# Altium PCB daplink_pzh.PcbDoc
Units mm, origin at the board's own origin, x right, y up, seen from the top; angles counter-clockwise.
Board outline 11.94 x 27.18 mm, 2 copper layers (Top1, Bottom2), stack 1.671 mm thick; 22 components, 28 nets, 122 pads, 54 vias.
Unrouted connection lines stored in the file: 21.
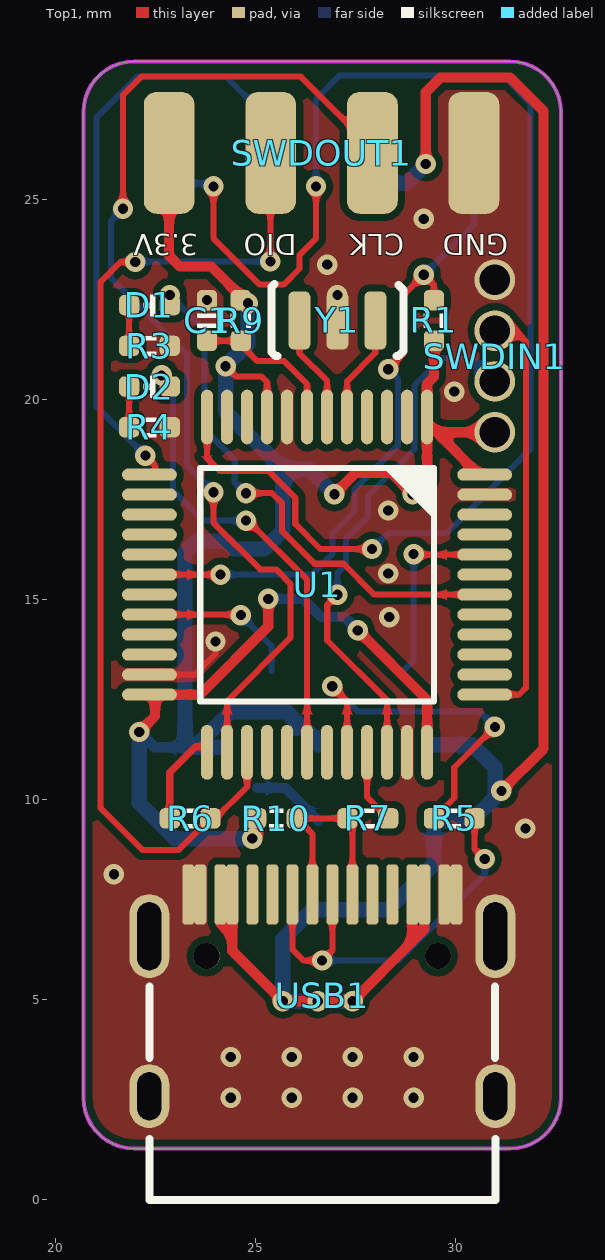
[diagram p0: Top1 view]
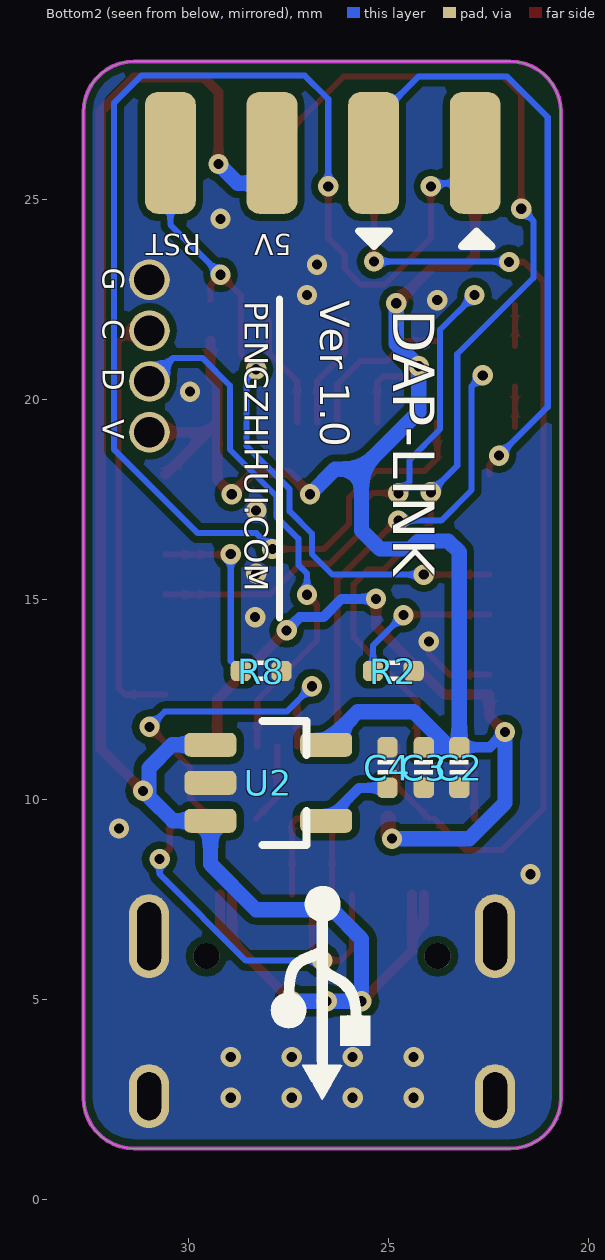
[diagram p1: Bottom2 view, seen from below]
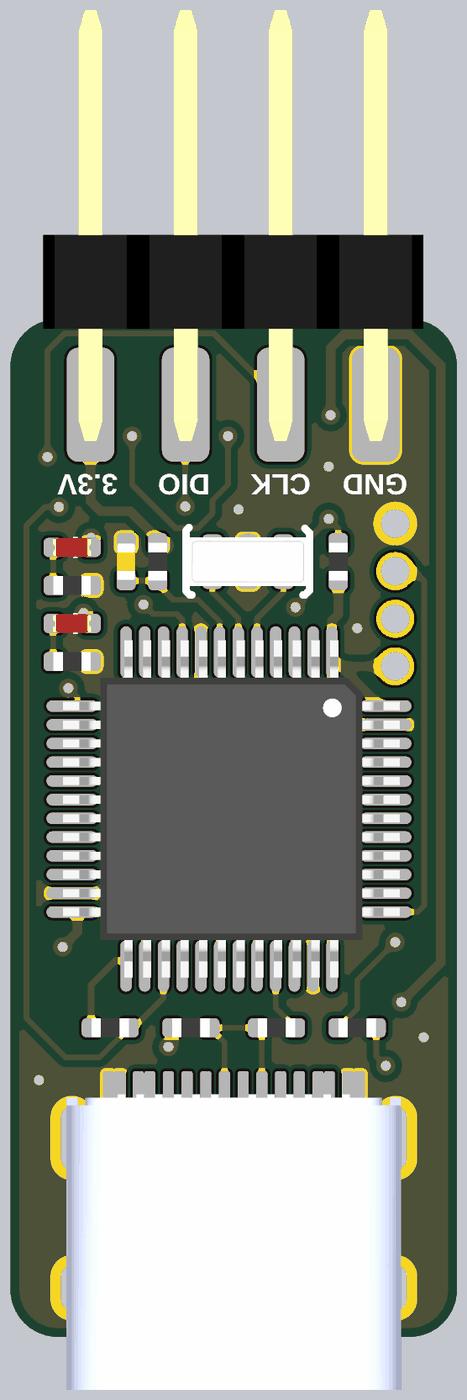
[diagram p2: 3D render of the assembled board from above, using the file's embedded part models]
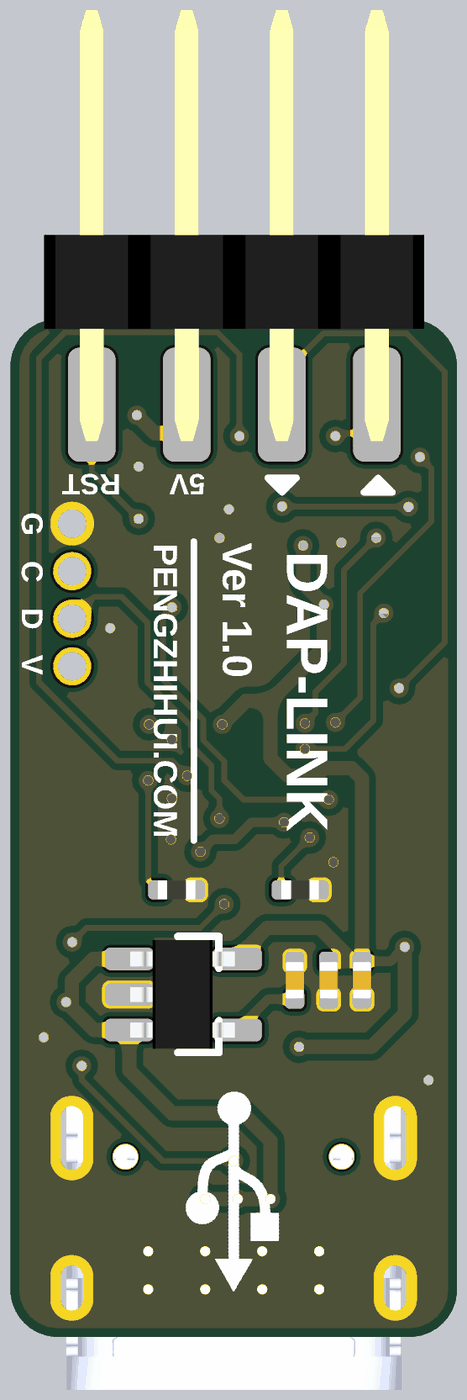
[diagram p3: 3D render of the assembled board from below, using the file's embedded part models]

## Layer stack, top to bottom
Top Solder: solder mask 0.0102, Solder Resist, Dk 3.5
Top1: signal copper 0.0356
Dielectric 1: core 1.6, FR-4, Dk 4.2
Bottom2: signal copper 0.0356
Bottom Solder: solder mask 0.0102, Solder Resist, Dk 3.5

## Board outline
20.701,2.54 20.701,27.178 cw(c21.971,27.178) 21.971,28.448 31.369,28.448 cw(c31.369,27.178) 32.639,27.178 32.639,2.54 cw(c31.369,2.54) 31.369,1.27 21.971,1.27 cw(c21.971,2.54)

## Design rules (kind name [scope] priority, off if disabled: settings)
Clearance [All] p1: gap=0.178 ignorepadtopadclearanceinfootprint=FALSE except(0: Arc-Hole Track-Hole SMDPad-Hole THPad-Hole Via-Hole Fill-Hole Poly-Hole Region-Hole Text-Hole)
ComponentClearance [All] p1: gap=0 collisioncheckmode=3 verticalgap=0 showdistances=FALSE
DiffPairsRouting [All] p1: maxlimit=2.54 minlimit=0.152 mostfreqgap=0.152 toplayer_minwidth=0.152 toplayer_maxwidth=2.54 toplayer_prefwidth=0.152 bottomlayer_minwidth=0.152 bottomlayer_maxwidth=2.54 bottomlayer_prefwidth=0.152 maxuncoupledlength=12.7
FanoutControl Fanout_BGA [All] p1: bgadir=Out bgaviamode=Centered fanoutstyle=Auto fanoutdirection=Alternating viagrid=0.025 // Fanout_BGA (Default Rule)
HoleSize [All] p1: absolutevalues=TRUE maxlimit=254 minlimit=0.203 maxpercent=80.000 minpercent=20.000
MinimumSolderMaskSliver [All] p1 off: minsoldermaskwidth=0.051
PlaneClearance [All] p1: clearance=0.203
PlaneConnect [All] p1: planeconnectstyle=Direct reliefexpansion=0.508 reliefentries=4 reliefconductorwidth=0.254 reliefairgap=0.254
PolygonConnect [All] p1: connectstyle=Direct reliefconductorwidth=0.254 reliefentries=4 polygonreliefangle="90 Angle" airgapwidth=0.254
RoutingVias [All] p1: holewidth=0.203 width=0.406 viastyle="Through Hole" minholewidth=0.152 minwidth=0.305 maxholewidth=0.711 maxwidth=1.27
SilkToBoardRegionClearance [All] p1 off:
SilkToSilkClearance [All] p1: silktosilkclearance=0
SilkToSolderMaskClearance [IsPad] p1: minsilkscreentomaskgap=0 clearancetoexposedcopper=TRUE
SolderMaskExpansion [All] p1: expansion=0.076
Width [All] p1: maxlimit=2.54 minlimit=0.152 preferedwidth=0.254
20 further rules are at their usual default settings.

## Classes and differential pairs
differential pair USB: +USB_P -USB_N

## Components (designator, comment, footprint, x,y, rotation, side; value= is the part's Value field where it differs from the comment)
C1 "0.1uF" CAP_0402 23.793,21.971 r270 top value=0.1u
C2 "0.1uF" CAP_0402 23.241,10.795 r90 bottom value=0.1u
C3 "10uF" CAP_0402 24.13,10.795 r90 bottom value=0.1u
C4 "10nF" CAP_0402 25.038,10.795 r270 bottom value=0.1u
D1 "color?" LED_0402_RED 22.352,22.352 r180 top
D2 "color?" LED_0402_RED 22.352,20.32 r180 top
R1 "10K" RES_0402 29.464,21.971 r270 top value=22R
R2 "10K" RES_0402 24.892,13.208 r180 bottom value=22R
R3 "2K" RES_0402 22.352,21.336 r180 top value=22R
R4 "2K" RES_0402 22.352,19.304 r180 top value=22R
R5 "22R" RES_0402 29.972,9.525 r180 top
R6 "100R" RES_0402 23.368,9.525 r0 top value=22R
R7 "22R" RES_0402 27.813,9.525 r0 top
R8 "10K" RES_0402 28.194,13.208 r180 bottom value=22R
R9 "10K" RES_0402 24.638,21.971 r90 top value=22R
R10 "1K5" RES_0402 25.527,9.525 r180 top value=22R
SWDIN1 "HDR1x4hole_1.25" HDR1X4_1.27_180 30.988,19.177 r180 top
SWDOUT1 "HDR2x4_2.54" HDR2X4_2.54_180H 22.845,26.162 r90 top
U1 "STM32F103CBT6" LQFP-48 26.543,15.367 r270 top locked
U2 "LP2992 3V3" SOT23-5 27.964,10.414 r180 bottom locked
USB1 "Type-C" Type-C-TOP 26.674,5.1 r270 top
Y1 "8MHz" 晶振-3P 27.051,21.971 r0 top

## Footprints (in the part's own frame and the unit in brackets; to place one, negate y for a bottom-side part, rotate by r counter-clockwise, add the part's x,y. Pads: shape width x height; smd on the part's side, far side on the other; paste and mask are expansions set on the pad)
CAP_0402 [mil]
  rrect50% 20x20 smd: 1(-20,0) 2(20,0)
  silkscreen extent -7,-9 7,9, body extent -20,-10 20,10, height 20
HDR1X4_1.27_180 [mil]
  round 40 hole 30: 1(0,0) 2(0,-50) 3(0,-100) 4(0,-150)
HDR2X4_2.54_180H [mil]
  rrect50% 120x50 smd: 1(0,0) 3(0,-100) 5(0,-200) 7(0,-300)
  rrect50% 120x50 smd far side: 2(0,0) 4(0,-100) 6(0,-200) 8(0,-300)
  body extent -38,-350 415,50, height 65
LED_0402_RED [mil]
  rrect50% 20x20 smd: 1(-20,0) 2(20,0)
  silkscreen extent -6,-10 6,10, body extent -20,-10 20,10, height 18
LQFP-48 [mil]
  oval 54x12 smd: 1(-165,108.27) 2(-165,88.58) 3(-165,68.9) 4(-165,49.21) 5(-165,29.53) 6(-165,9.84) 7(-165,-9.84) 8(-165,-29.53) 9(-165,-49.21) 10(-165,-68.9) 11(-165,-88.58) 12(-165,-108.27) 25(165,-108.27) 26(165,-88.58) 27(165,-68.9) 28(165,-49.21) 29(165,-29.53) 30(165,-9.84) 31(165,9.84) 32(165,29.53) 33(165,49.21) 34(165,68.9) 35(165,88.58) 36(165,108.27)
  oval 12x54 smd: 13(-108.27,-165) 14(-88.58,-165) 15(-68.9,-165) 16(-49.21,-165) 17(-29.53,-165) 18(-9.84,-165) 19(9.84,-165) 20(29.53,-165) 21(49.21,-165) 22(68.9,-165) 23(88.58,-165) 24(108.27,-165) 37(108.27,165) 38(88.58,165) 39(68.9,165) 40(49.21,165) 41(29.53,165) 42(9.84,165) 43(-9.84,165) 44(-29.53,165) 45(-49.21,165) 46(-68.9,165) 47(-88.58,165) 48(-108.27,165)
  silkscreen extent -115,-115 115,115, body extent -177,-175 177,180, height 61
RES_0402 [mil]
  rrect50% 20x20 smd: 1(-20,0) 2(20,0)
  silkscreen extent -7,-10 7,10, body extent -20,-10 20,10, height 14
SOT23-5 [mm] "SOT23, 3-Leads, Body 3.1x3.0mm (max), Pitch 0.95mm, IPC Medium Density"
  rrect50% 1.3x0.6 smd: 1(-1.5,0.95) 2(-1.5,0) 3(-1.5,-0.95) 4(1.396,-0.95) 5(1.396,0.95)
  silkscreen extent -0.2,-1.55 0.9,1.55, body extent -1.48,-1.45 1.32,1.45, height 1.2
Type-C-TOP [mm]
  round 0.65 hole 0.65: 0(-0.98,2.89) 0(-0.98,-2.89)
  oval 1.6x1 hole 0.6 slot 1.2 at 0 deg: 1(2.52,4.325) 2(2.52,-4.325)
  oval 2.1x1 hole 0.6 slot 1.7 at 0 deg: 3(-1.48,-4.325) 4(-1.48,4.325)
  rrect50% 1.5x0.3 smd: A1(-2.52,-3.35) A4(-2.52,-2.55) A5(-2.52,-1.25) A6(-2.52,-0.25) A7(-2.52,0.25) A8(-2.52,1.25) A9(-2.52,2.55) A12(-2.52,3.35) B1(-2.52,3.05) B4(-2.52,2.25) B5(-2.52,1.75) B6(-2.52,0.75) B7(-2.52,-0.75) B8(-2.52,-1.75) B9(-2.52,-2.25) B12(-2.52,-3.05)
  silkscreen extent -0.22,-4.33 5.12,4.33, body extent -2.64,-4.48 5.26,4.46, height 3.28
晶振-3P [mm] "贴片晶振"
  rrect50% 0.55x1.45 smd: 1(-0.95,0) 2(0,0) 3(0.95,0)
  silkscreen extent -1.65,-0.89 1.65,0.91, body extent -1.65,-0.89 1.65,0.89, height 0.8

## Part data
C1 C2 C3 C4: library part 电容-0402, "Capacitor"
D1 D2: library part LED_0402, "LED", Type=0402
R1 R2 R3 R4 R5 R6 R7 R8 R9 R10: library part 电阻-0402, "Resistor"
SWDIN1 SWDOUT1: "Header"
U1: "ARM Cortex-M3 32-bit MCU, 128 KB Flash, 20 KB Internal RAM, 37 I/Os, 48-pin LQFP, -40 to 85 degC, Tray", I/Os (High Current)=37, Operating Frequency(F) (Processor speed) (MHz)=72, Supplier Part Number 1=497-6288-ND, Supply Voltage(Vcc) min (V)=2, A/D Converter="2x12-bit (10 Channel)", ComponentLink1Description="Manufacturer URL", ComponentLink1URL=http://www.st.com/web/en/home.html, ComponentLink2Description=Datasheet, ComponentLink2URL=http://www.st.com/st-web-ui/static/active/en/resource/technical/document/datasheet/CD00161566.pdf, ComponentLink3Description="Package Specification", ComponentLink3URL=http://www.st.com/st-web-ui/static/active/en/resource/technical/document/datasheet/DM00058181.pdf, Core="ARM Cortex-M3", DatasheetVersion="Rev. 16", FLASH Size (Prog) (kB)=128, Internal RAM Size (kB)=20, Mounting Technology="Surface Mount", PackageDescription="48-Pin Low Profile Quad Flat Package, 7 x 7 mm Body, 0.5 mm Pitch", PackageReference=LQFP48, PackageVersion="Rev. 6, 06/2013", Packing=Tray, PartNumber=STM32F103CBT6, Supplier 1=Digi-Key, Supplier 2=Farnell, Supplier 3=Newark, Supplier 4=Newark, Supplier 5=Mouser, Supplier Part Number 2=1606327, Supplier Part Number 3=11N8296, Supplier Part Number 4=57P1214, Supplier Part Number 5=511-STM32F103CBT6
U2: library part LP2992, "LDO"
USB1: library part USB-Type-C-TOP
Y1: library part 晶振-3Pin, "村田贴片"

## Via types
v1: diameter 0.508, hole 0.254, Top1 to Bottom2, tented both sides, 54 vias

## Nets (pads, with @x,y where several pads share a name; then routed paths per layer and width w, separated by ;. In a path a pad name is that pad's centre, name@x,y a point inside that pad or via, vN(x,y) a via of type N, cw(c..) or ccw(c..) an arc to the next point about the centre after c; other vN are vias at no path point)
3V3: C2.2 C3.2 R1.2 R9.2 R10.2 SWDIN1.1 SWDOUT1.1 U1.1 U1.9 U1.24 U1.36 U1.48 U2.5 | length 55.1
  Top1 w0.152: v1(24.257,20.828) 24.511,20.574 25.146,20.574 25.293,20.427 U1.9@25.293,19.417
  Top1 w0.254: v1(22.098,11.684) 22.493,12.079 22.493,12.617 23.615,12.617 25.324,14.326 v1(25.324,15.011) ; SWDOUT1.1@22.845,25.4 22.845,23.586 23.114,23.317 23.901,23.317 v1(24.816,22.403) 24.714,22.403 R9.2 ; v1(26.975,17.628) 27.508,18.161 28.397,18.161 v1(28.931,17.628) 29.293,17.99 U1.1@29.293,19.417 ; v1(27.559,14.224) 29.293,12.49 U1.36@29.293,11.317 ; R1.2 29.464,20.56 29.293,20.389 U1.1@29.293,19.417 ; U1.48@30.593,18.117 29.533,19.177 ; SWDIN1.1 29.533,19.177 ; U1.1@29.293,19.417 29.533,19.177
  Top1 w0.381: v1(24.924,9.017) 25.019,9.112 R10.2
  Bottom2 w0.254: v1(22.098,11.684) 22.479,11.303 C2.2 ; v1(25.324,15.011) 26.187,15.011 26.645,14.554 27.229,14.554 v1@27.432,14.351
  Bottom2 w0.381: v1(22.098,11.684) 22.098,9.906 22.987,9.017 v1(24.924,9.017) ; C3.2 23.495,11.303 ; v1(24.816,22.403) 24.816,21.387 v1(24.257,20.828) 24.257,19.685 25.686,18.256 ; U2.5 26.568,11.405 25.781,12.192 24.384,12.192 23.495,11.303 ; v1(26.975,17.628) 26.346,18.256 25.686,18.256 ; 23.495,11.303 C2.2 23.241,16.18 23.52,16.459 24.257,16.459 24.46,16.256 25.222,16.256 25.686,16.72 25.686,18.256
5V: SWDOUT1.6 U2.1 U2.3 USB1.A4 USB1.A9 USB1.B4 USB1.B9 | length 48.3
  Top1 w0.254: USB1.A4 24.124,6.904 24.424,6.604 ; USB1.B9 24.424,6.604 ; USB1.B4 28.924,6.445 ; USB1.A9 29.224,6.745 28.924,6.445 ; v1(29.261,25.883) 29.261,27.677 29.625,28.042 31.369,28.042 32.207,27.203 32.207,11.267 v1(31.151,10.211) ; 24.424,6.604 24.424,6.215 v1(25.686,4.953) v1(26.559,4.953) v1(27.432,4.953) 28.924,6.445
  Bottom2 w0.381: v1(27.432,4.953) v1(26.559,4.953) v1(25.686,4.953) 25.686,6.509 26.416,7.239 28.321,7.239 29.464,8.382 U2.3 30.404,9.464 v1@30.999,10.059 ; SWDOUT1.6@27.925,25.4 28.778,25.4 v1(29.261,25.883) ; U2.1 30.419,11.364 30.999,10.784 v1@30.999,10.059 ; v1(31.151,10.211) v1@30.999,10.059
BOOT0: R8.1 U1.44 | length 4.7
  Top1 w0.152: v1@28.968,16.117 U1.44@30.593,16.117
  Bottom2 w0.152: R8.1 28.956,13.462 v1(28.956,16.129)
BOOT1: R2.1 U1.20 | length 3.8
  Top1 w0.152: U1.20@22.493,14.617 v1@24.626,14.617
  Bottom2 w0.152: v1(24.638,14.605) 25.4,13.843 R2.1
D_SWCLK: SWDIN1.3 U1.37 | length 10.8
  Top1 w0.152: U1.37@30.593,12.617 31.591,12.617 31.763,12.789 31.763,21.45 31.496,21.717 SWDIN1.3
D_SWDIO: SWDIN1.2 U1.34 | length 13.1
  Top1 w0.152: v1(27.051,15.113) 26.797,14.859 26.797,13.97 28.293,12.474 U1.34@28.293,11.317
  Bottom2 w0.152: v1(27.051,15.113) 27.051,15.646 27.264,15.859 27.264,16.517 27.813,17.066 27.813,17.583 28.975,18.745 28.975,20.346 29.66,21.031 30.404,21.031 SWDIN1.2
GND: C1.1 C2.1 C3.1 C4.1 R2.2 R3.1 R4.1 R8.2 SWDIN1.4 SWDOUT1.7 U1.8 U1.23 U1.35 U1.47 U2.2 USB1.1 USB1.2 USB1.3 USB1.4 USB1.A1 USB1.A12 USB1.B1 USB1.B12 Y1.2 | length 2
  Top1 w0.152: U1.23@22.493,13.117 23.48,13.117 24.003,13.64 v1(24.003,13.945)
  other v1: 24.384,2.54 25.908,2.54 27.432,2.54 28.956,2.54 24.384,3.556 25.908,3.556 27.432,3.556 28.956,3.556 21.463,8.128 31.75,9.271 28.346,14.554 28.321,15.646 28.321,17.221 29.972,20.193 23.793,22.479 27.051,22.606 26.797,23.368 29.21,24.511
LED_CON: D1.1 U1.42 | length 13
  Top1 w0.152: v1(24.765,17.653) 25.416,17.653 25.667,17.401 25.667,16.7 26.479,15.888 27.203,15.888 27.975,15.117 U1.42@30.593,15.117
  Bottom2 w0.152: v1(22.86,22.606) 23.724,21.742 23.724,19.253 24.486,18.491 24.486,17.932 v1(24.765,17.653)
LED_RUN: D2.1 U1.30 | length 11.4
  Top1 w0.152: v1(24.765,16.967) 24.816,16.967 26.293,15.49 U1.30@26.293,11.317
  Bottom2 w0.152: v1(22.657,20.599) 22.936,20.32 22.936,17.729 23.698,16.967 v1(24.765,16.967)
NetC1_2: C1.2 R9.1 U1.7 | length 4
  Top1 w0.152: C1.2 R9.1 24.638,21.368 25.051,20.955 25.72,20.955 26.293,20.382 U1.7@26.293,19.417
NetC4_2: C4.2 U2.4 | length 1.9
  Bottom2 w0.254: C4.2 25.745,10.287 U2.4
NetD1_2: D1.2 R3.2 | length 1
  Top1 w0.152: R3.2 D1.2
NetD2_2: D2.2 R4.2 | length 1
  Top1 w0.152: R4.2 D2.2
NetR5_2: R5.2 U1.32 | length 9.1
  Top1 w0.152: v1(26.924,12.827) 27.293,12.458 U1.32@27.293,11.317 ; R5.2 29.972,10.033 29.972,10.795 v1(30.988,11.811)
  Bottom2 w0.152: v1(26.924,12.827) 27.559,12.192 30.607,12.192 v1(30.988,11.811)
NetR6_1: R6.1 U1.25 | length 2.3
  Top1 w0.178: R6.1 22.86,10.668 23.509,11.317 U1.25@23.793,11.317
NetR7_2: R7.2 U1.33 | length 2
  Top1 w0.152: U1.33@27.793,11.317 27.793,10.053 R7.2
NetU1_5: U1.5 Y1.3 | length 2.8
  Top1 w0.152: U1.5@27.293,19.417 27.293,20.455 28.001,21.163 Y1.3
NetU1_6: U1.6 Y1.1 | length 2.8
  Top1 w0.152: Y1.1 26.101,21.151 26.793,20.459 U1.6@26.793,19.417
nRST: R1.1 SWDOUT1.8 U1.18 | length 16.3
  Top1 w0.152: U1.18@22.493,15.617 v1(24.13,15.617) ; v1(28.321,20.752) 28.702,21.133 28.702,22.606 v1(29.21,23.114) 29.464,22.86 R1.1
  Bottom2 w0.152: v1(24.13,15.617) 26.412,15.617 26.924,16.129 26.924,16.644 27.483,17.203 27.483,17.755 28.562,18.834 28.562,20.511 v1(28.321,20.752) ; v1(29.21,23.114) 30.465,24.369 SWDOUT1.8@30.465,25.4
TCK_SWCLK: SWDOUT1.5 U1.26 | length 27.2
  Top1 w0.152: v1(21.692,24.765) 21.692,27.61 22.149,28.067 26.137,28.067 27.925,26.279 SWDOUT1.5 SWDOUT1.5@27.925,25.4 ; v1(23.952,17.678) 23.952,16.916 25.121,15.748 25.517,15.748 25.883,15.382 25.883,14.046 24.293,12.457 U1.26@24.293,11.317
  Bottom2 w0.152: v1(21.692,24.765) 21.387,24.46 21.387,23.038 23.292,21.133 23.292,18.339 v1(23.952,17.678)
TDI: U1.17
TDO: U1.15
TMS_SWDIO: R6.2 SWDOUT1.3 U1.27 | length 25.2
  Top1 w0.152: v1(21.996,23.434) 21.63,23.434 21.133,22.936 21.133,9.779 22.174,8.738 23.089,8.738 R6.2 ; R6.2@24.003,9.525 24.793,10.315 U1.27@24.793,11.317 ; v1(25.375,23.444) 25.375,25.39 SWDOUT1.3@25.385,25.4
  Bottom2 w0.152: v1(21.996,23.434) 22.007,23.444 v1(25.375,23.444)
UART2_RX: SWDOUT1.4 U1.13 | length 16.3
  Top1 w0.152: v1(22.25,18.593) 22.493,18.35 U1.13@22.493,18.117
  Bottom2 w0.152: v1(22.25,18.593) 21.031,19.812 21.031,27.051 22.047,28.067 24.266,28.067 25.385,26.948 SWDOUT1.4 SWDOUT1.4@25.385,25.4
UART2_TX: SWDOUT1.2 U1.12 | length 35.4
  Top1 w0.152: U1.12@23.793,19.417 23.793,18.523 24.105,18.212 25.324,18.212 25.998,17.538 25.998,16.887 26.628,16.256 v1(27.915,16.256) ; v1(23.952,25.324) 23.952,24.029 25.111,22.87 25.705,22.87 26.106,23.271 26.106,23.613 26.518,24.024 v1(26.518,25.324)
  Bottom2 w0.152: SWDOUT1.2@22.845,25.4 v1@23.876,25.4 ; v1(26.518,25.324) 26.518,27.508 27.102,28.092 31.191,28.092 31.877,27.407 31.877,18.752 29.782,16.657 28.316,16.657 v1(27.915,16.256)
USB_ENUM: U1.28
USB_N: R5.1 USB1.A7 USB1.B7 | length 10.4
  Top1 w0.152: USB1.B7 25.924,6.257 26.212,5.969 v1(26.67,5.969) 26.924,6.223 USB1.A7 ; R5.1 30.48,8.763 v1(30.734,8.509)
  Bottom2 w0.152: v1(26.67,5.969) 28.575,5.969 30.734,8.128 v1(30.734,8.509)
USB_P: R7.1 R10.1 USB1.A6 USB1.B6 | length 5.3
  Top1 w0.152: USB1.A6 26.424,9.136 R10.1 R7.1 27.424,9.406 USB1.B6
pads on no net: U1.2 U1.3 U1.4 U1.10 U1.11 U1.14 U1.16 U1.19 U1.21 U1.22 U1.29 U1.31 U1.38 U1.39 U1.40 U1.41 U1.43 U1.45 U1.46 USB1.0 USB1.A5 USB1.A8 USB1.B5 USB1.B8

## Polygon pours and split planes (outlines as drawn)
GND on Bottom2 "Bottom2-GND" (solid, remove dead copper, pour order 0): 19.05,29.21 34.29,29.21 34.29,0 19.05,0
GND on Top1 "Top1-GND" (solid, remove dead copper, pour order 2): 19.05,29.21 34.29,29.21 34.29,0 19.05,0

## Keep-outs
Keep-Out Layer:
  the board outline again, w0.102

## Silkscreen, mask and mechanical layers (free items; w line width, h text height)
Top Overlay:
  text "3.3V" at 23.571,24.308 h0.89 r180
  text "DIO" at 26.035,24.308 h0.89 r180
  text "CLK" at 28.727,24.308 h0.89 r180
  text "GND" at 31.318,24.308 h0.89 r180
Bottom Overlay:
  drawing of 698 lines, arcs and shapes, not listed
  text "5V" at 27.432,24.308 h0.89 r180
  text "RST" at 29.693,24.308 h0.89 r180
  text "G   C   D   V" at 32.334,23.292 h0.91 r90
  text "Ver 1.0" at 26.962,22.479 h1.27 r90
  text "PENGZHIHUI.COM" at 28.804,22.454 h1.02 r90
  text "DAP-LINK" at 25.248,22.25 h1.78 r90
Mechanical 1:
  the board outline again, w0.102
Drill Drawing:
  circle w0.254: c5.223,70.924 r0.847
  lines w0.254: 4.376,58.647 5.223,59.07 6.07,58.647 5.646,59.494 6.07,60.34 5.223,59.917 4.376,60.34 4.8,59.494 4.376,58.647 ; 4.376,62.457 6.07,62.457 6.07,64.15 4.376,64.15 4.376,62.457 ; 4.376,66.69 4.8,66.69 5.223,66.267 5.646,66.69 6.07,66.69 5.646,67.114 6.07,67.537 5.646,67.537 5.223,67.96 4.8,67.537 4.376,67.537 4.8,67.114 4.376,66.69 ; 4.376,75.58 6.07,75.58 5.223,73.887 4.376,75.58
  lines w0.381: 2.857,57.504 274.918,57.504 ; 2.857,76.554 274.918,76.554 ; 16.85,53.694 16.85,80.364 ; 30.562,53.694 30.562,80.364 ; 58.494,53.694 58.494,80.364 ; 71.343,53.694 71.343,80.364 ; 89.982,53.694 89.982,80.364 ; 120.199,53.694 120.199,80.364 ; 135.181,53.694 135.181,80.364 ; 154.125,53.694 154.125,80.364 ; 184.342,53.694 184.342,80.364 ; 206.027,53.694 206.027,80.364 ; 239.901,53.694 239.901,80.364 ; 2.857,53.694 274.918,53.694 274.918,80.364 2.857,80.364 2.857,53.694
  text "Symbol" at 5.143,77.697 h1.83
  text "Count" at 17.993,77.697 h1.83
  text "Hole Size" at 31.705,77.697 h1.83
  text "Plated" at 59.637,77.697 h1.83
  text "Hole Type" at 72.486,77.697 h1.83
  text "Drill Layer Pair" at 91.125,77.697 h1.83
  text "Via/Pad" at 121.342,77.697 h1.83
  text "Pad Shape" at 136.324,77.697 h1.83
  text "Template" at 155.268,77.697 h1.83
  text "Description" at 185.485,77.697 h1.83
  text "Hole Tolerance (+)" at 207.17,77.697 h1.83
  text "Hole Tolerance (-)" at 241.044,77.697 h1.83
  text "2" at 17.993,73.887 h1.52
  text "23.62mil (0.600mm)" at 31.705,73.887 h1.52
  text "PTH" at 59.637,73.887 h1.52
  text "Slot" at 72.486,73.887 h1.52
  text "Top1 - Bottom2" at 91.125,73.887 h1.52
  text "Pad" at 121.342,73.887 h1.52
  text "Rounded" at 136.324,73.887 h1.52
  text "r160_100h60_120r100" at 155.268,73.887 h1.52
  text "2" at 17.993,70.077 h1.52
  text "23.62mil (0.600mm)" at 31.705,70.077 h1.52
  text "PTH" at 59.637,70.077 h1.52
  text "Slot" at 72.486,70.077 h1.52
  text "Top1 - Bottom2" at 91.125,70.077 h1.52
  text "Pad" at 121.342,70.077 h1.52
  text "Rounded" at 136.324,70.077 h1.52
  text "r210_100h60_170r100" at 155.268,70.077 h1.52
  text "2" at 17.993,66.267 h1.52
  text "25.59mil (0.650mm)" at 31.705,66.267 h1.52
  text "PTH" at 59.637,66.267 h1.52
  text "Round" at 72.486,66.267 h1.52
  text "Top1 - Bottom2" at 91.125,66.267 h1.52
  text "Pad" at 121.342,66.267 h1.52
  text "Rounded" at 136.324,66.267 h1.52
  text "c65h65" at 155.268,66.267 h1.52
  text "4" at 17.993,62.457 h1.52
  text "30.00mil (0.762mm)" at 31.705,62.457 h1.52
  text "PTH" at 59.637,62.457 h1.52
  text "Round" at 72.486,62.457 h1.52
  text "Top1 - Bottom2" at 91.125,62.457 h1.52
  text "Pad" at 121.342,62.457 h1.52
  text "Rounded" at 136.324,62.457 h1.52
  text "c102h76" at 155.268,62.457 h1.52
  text "54" at 17.993,58.647 h1.52
  text "10.00mil (0.254mm)" at 31.705,58.647 h1.52
  text "PTH" at 59.637,58.647 h1.52
  text "Round" at 72.486,58.647 h1.52
  text "Top1 - Bottom2" at 91.125,58.647 h1.52
  text "Via" at 121.342,58.647 h1.52
  text "Rounded" at 136.324,58.647 h1.52
  text "v51h25m0mx0" at 155.268,58.647 h1.52
  text "64 Total" at 17.993,54.837 h1.52
  text "Slot definitions :" at 5.143,51.155 h1.52
  text "Routed Path Length" at 31.374,51.155 h1.52
  text "= Calculated from tool start centre position to tool end centre position." at 59.382,51.155 h1.52
  text "Hole Length" at 31.374,48.615 h1.52
  text "= Routed Path Length + Tool Size = Slot length as defined in the PCB layout" at 48.971,48.615 h1.52